# Altium PCB V72_A33.PcbDoc
Units mil, origin at the board's own origin, x right, y up, seen from the top; angles counter-clockwise.
Board outline 1295 x 2050 mil, 2 copper layers (Top Layer, Bottom Layer); 4 components, 19 nets, 95 pads, 3 vias.
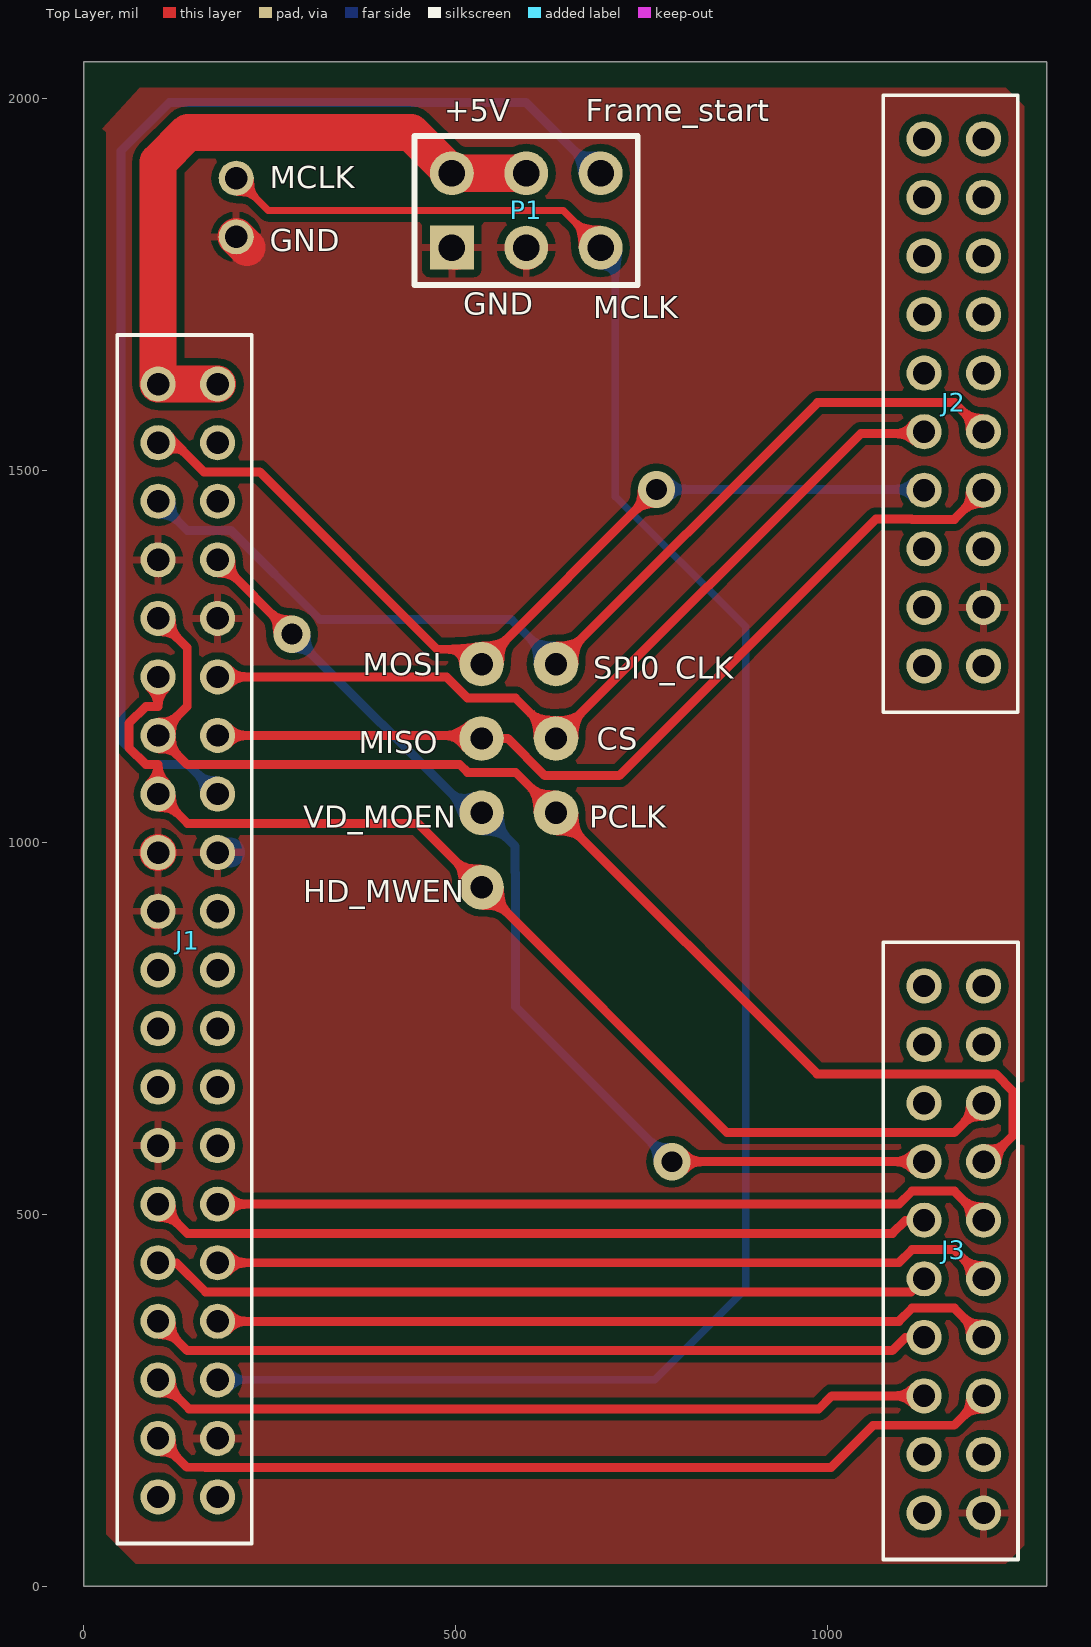
[diagram p0: Top Layer view]
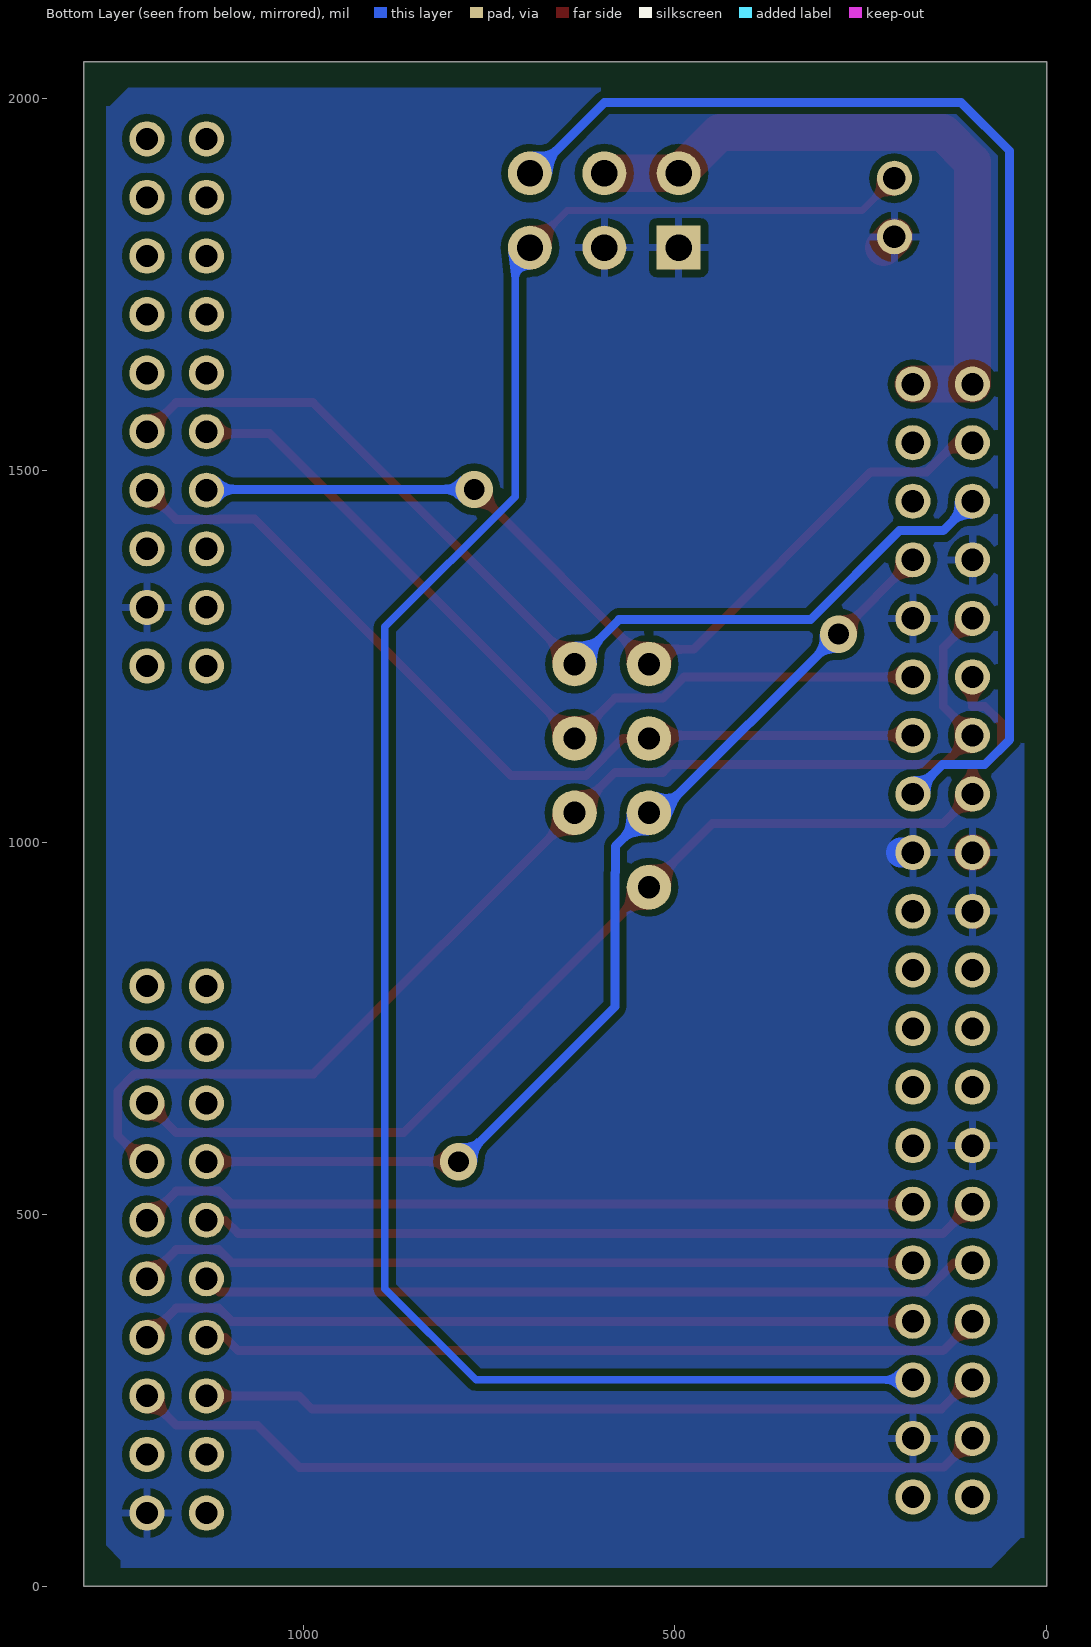
[diagram p1: Bottom Layer view, seen from below]

## Layer stack, top to bottom
Top Solder: solder mask 0.4, Solder Resist, Dk 3.5
Top Layer: signal copper 1.4
Dielectric 1: dielectric 12.6, FR-4, Dk 4.8
Bottom Layer: signal copper 1.4
Bottom Solder: solder mask 0.4, Solder Resist, Dk 3.5

## Board outline
0,0 0,2050 1295,2050 1295,0

## Design rules (kind name [scope] priority, off if disabled: settings)
Clearance [All] p1: gap=9.6 ignorepadtopadclearanceinfootprint=FALSE
PolygonConnect [All] p1: connectstyle=Relief reliefconductorwidth=10 reliefentries=4 polygonreliefangle="90 Angle" airgapwidth=10
RoutingVias [All] p1: holewidth=28 width=50 viastyle="Through Hole" minholewidth=28 minwidth=50 maxholewidth=28 maxwidth=50
SilkToSilkClearance [All] p1: silktosilkclearance=0
SilkToSolderMaskClearance [IsPad] p1: minsilkscreentomaskgap=0 clearancetoexposedcopper=TRUE
SolderMaskExpansion [All] p1: expansion=4
Width Width__VCC [InNet('+5V')] p1: maxlimit=50 minlimit=10 preferedwidth=30
Width [All] p2: maxlimit=50 minlimit=10 preferedwidth=10
28 further rules are at their usual default settings.

## Classes and differential pairs
component class V72_A33: P1

## Components (designator, comment, footprint, x,y, rotation, side; value= is the part's Value field where it differs from the comment)
J1 "header2*20_2mm" header2*20_2mm 45,57.64 r0 top
J2 "header2*10_2mm" header2*10_2mm 1075,1175.12 r0 top
J3 "header2*10_2mm" header2*10_2mm 1075.04,36.06 r0 top
P1 "Header 3X2" HDR2X3 495,1800 r0 top

## Footprints (in the part's own frame and the unit in brackets; to place one, negate y for a bottom-side part, rotate by r counter-clockwise, add the part's x,y. Pads: shape width x height; smd on the part's side, far side on the other; paste and mask are expansions set on the pad)
HDR2X3 [mm] "Connector; Header; 3x2 Position"
  rect 1.5x1.5 hole 0.9: 1(0,0)
  round 1.5 hole 0.9: 2(0,2.54) 3(2.54,0) 4(2.54,2.54) 5(5.08,0) 6(5.08,2.54)
  silkscreen extent -1.27,-1.27 6.35,3.81
header2*10_2mm [mm] "header"
  round 1.2 hole 0.762: 1(1.396,19.586) 2(3.429,19.586) 3(1.396,17.586) 4(3.429,17.586) 5(1.396,15.586) 6(3.429,15.586) 7(1.396,13.586) 8(3.429,13.586) 9(1.396,11.586) 10(3.429,11.586) 11(1.396,9.586) 12(3.429,9.586) 13(1.396,7.586) 14(3.429,7.586) 15(1.396,5.586) 16(3.429,5.586) 17(1.396,3.586) 18(3.429,3.586) 19(1.396,1.586) 20(3.429,1.586)
  silkscreen extent 0,0 4.6,21.08
header2*20_2mm [mm]
  round 1.2 hole 0.762: 1(1.397,39.594) 2(3.43,39.594) 3(1.397,37.594) 4(3.43,37.594) 5(1.397,35.594) 6(3.43,35.594) 7(1.397,33.594) 8(3.43,33.594) 9(1.397,31.594) 10(3.43,31.594) 11(1.397,29.594) 12(3.43,29.594) 13(1.397,27.594) 14(3.43,27.594) 15(1.397,25.594) 16(3.43,25.594) 17(1.397,23.594) 18(3.43,23.594) 19(1.397,21.59) 20(3.43,21.59) 21(1.396,19.586) 22(3.429,19.586) 23(1.396,17.586) 24(3.429,17.586) 25(1.396,15.586) 26(3.429,15.586) 27(1.396,13.586) 28(3.429,13.586) 29(1.396,11.586) 30(3.429,11.586) 31(1.396,9.586) 32(3.429,9.586) 33(1.396,7.586) 34(3.429,7.586) 35(1.396,5.586) 36(3.429,5.586) 37(1.396,3.586) 38(3.429,3.586) 39(1.396,1.586) 40(3.429,1.586)
  silkscreen extent 0,0 4.6,41.27

## Part data
P1: "Header, 3-Pin, Dual row", LatestRevisionDate=17-Jul-2002, LatestRevisionNote="Re-released for DXP Platform.", Publisher="Altium Limited"

## Free pads (board coordinates)
  round 60 hole 30: 42(535,1040) 43(535,1140) 44(535,1240) 45(635,1040) 46(635,1140) 47(635,1240) 50(535,940)
  round 47.24 hole 30: 48(205,1893.35) 49(205,1814.61)

## Via types
v1: diameter 50, hole 28, Top Layer to Bottom Layer, 3 vias

## Nets (pads, with @x,y where several pads share a name; then routed paths per layer and width w, separated by ;. In a path a pad name is that pad's centre, name@x,y a point inside that pad or via, vN(x,y) a via of type N, cw(c..) or ccw(c..) an arc to the next point about the centre after c; other vN are vias at no path point)
+5V: J1.1 J1.2 P1.2 P1.4 | length 912.9
  Top Layer w50: J1.2 J1.1 100,1915 140,1955 440,1955 P1.2 P1.4
A0: J1.37 J3.16 | length 1166.3
  Top Layer w12: J1.37 138.78,160 163.35,160 163.75,159.6 1004.6,159.6 1061.47,216.47 1170.52,216.47 J3.16
A1: J1.35 J3.15 | length 1053.6
  Top Layer w12: J1.35 102.44,277.56 141.66,238.34 988.34,238.34 1005.98,255.98 J3.15
A2: J1.34 J3.14 | length 1053.6
  Top Layer w12: J1.34 1096.11,356.3 1113.75,373.95 1170.82,373.95 J3.14
A3: J1.33 J3.13 | length 1053.8
  Top Layer w12: J1.33 139.48,316.78 1087.14,316.78 1105.08,334.72 J3.13
A4: J1.32 J3.12 | length 1053.6
  Top Layer w12: J1.32 1096.11,435.04 1113.75,452.69 1170.82,452.69 J3.12
A5: J1.31 J3.11 | length 1053.6
  Top Layer w12: J1.31 124.53,435.04 163.75,395.82 1112.35,395.82 J3.11
A6: J1.30 J3.10 | length 1053.6
  Top Layer w12: J1.30 1096.11,513.78 1113.75,531.43 1170.82,531.43 J3.10
A7: J1.29 J3.9 | length 1053.6
  Top Layer w12: J1.29 139.18,474.56 1087.43,474.56 1105.08,492.2 J3.9
Frame_start: J1.16 P1.6 | length 1663.1
  Bottom Layer w12: J1.16 140.52,1104.79 83.75,1104.79 50,1138.55 50,1930 115,1995 595,1995 690,1900 P1.6
GND: J1.7 J1.10 J1.17 J1.18 J1.19 J1.27 J1.38 J2.18 J3.20 P1.1 P1.3 pad.49 | length 91.6
  Top Layer w12: J1.19@94.17,890 100,890 J1.19 ; J1.7 J1.7@115.24,1380.24 ; J2.18 J2.18@1213.7,1316.3
  Top Layer w50: pad.49 pad.49@219.61,1800 ; P1.1 P1.1@500,1795 ; P1.3@595,1795 P1.3
  Bottom Layer w40: J1.18 J1.18@196.54,986.54
HD_MWEN: J1.11 J1.15 J3.6 pad.50 | length 1524.1
  Top Layer w12: J1.11 100,1183.24 83.75,1183.24 60.78,1160.26 60.78,1127.77 83.75,1104.79 100,1104.79 J1.15 139.52,1025.76 449.24,1025.76 pad.50 864.83,610.17 1146.25,610.17 1146.41,610 1170.35,610 J3.6
MCLK: J1.36 P1.5 pad.48 | length 2770.2
  Top Layer w10: pad.48 248.35,1850 645,1850 P1.5
  Bottom Layer w10: J1.36 767.56,277.56 890,400 890,1290 715,1465 715,1780 P1.5
PCLK: J1.9 J1.13 J3.8 pad.45 | length 1651.3
  Top Layer w12: J1.9 139.22,1262.27 139.22,1183.24 J1.13 139.22,1104.79 196.29,1104.79 196.49,1105 505.51,1105 516.11,1094.4 580.6,1094.4 pad.45 986.09,688.91 1226.29,688.91 1249.26,665.93 1249.26,605.74 1214.47,570.94 J3.8
SPI0-CLK: J1.5 J2.12 pad.47 | length 1362.6
  Top Layer w12: pad.47 986.74,1591.74 1170.78,1591.74 J2.12
  Bottom Layer w12: J1.5 139.52,1419.46 198.23,1419.46 317.69,1300 575,1300 pad.47
SPI0-CS: J1.12 J2.11 pad.46 | length 1155.1
  Top Layer w12: J1.12 487.76,1222.76 516.11,1194.4 580.6,1194.4 pad.46 1045,1550 1127.44,1550 J2.11
SPI0-MISO: J1.14 J2.14 pad.43 | length 1211.7
  Top Layer w12: J1.14 530.98,1144.02 pad.43 570,1140 620,1090 720,1090 1065,1435 1113.27,1435 1113.71,1434.56 1170.78,1434.56 J2.14
SPI0-MOSI: J1.3 J2.13 pad.44 | length 1251.1
  Top Layer w12: J1.3 122.28,1537.72 161.51,1498.49 236.51,1498.49 475,1260 515,1260 pad.44 v1(770,1475)
  Bottom Layer w12: v1(770,1475) 1128.74,1475 J2.13
VD_MOEN: J1.8 J3.7 pad.42 | length 1403.5
  Top Layer w12: J1.8 v1(280,1280.28) ; v1(790.94,570.94) J3.7
  Bottom Layer w12: v1(280,1280.28) 520.28,1040 pad.42 580,995 580,960.09 580.6,959.49 580.6,779.4 v1@785,575
pads on no net: J1.4 J1.6 J1.20 J1.21 J1.22 J1.23 J1.24 J1.25 J1.26 J1.28 J1.39 J1.40 J2.1 J2.2 J2.3 J2.4 J2.5 J2.6 J2.7 J2.8 J2.9 J2.10 J2.15 J2.16 J2.17 J2.19 J2.20 J3.1 J3.2 J3.3 J3.4 J3.5 J3.17 J3.18 J3.19

## Polygon pours and split planes (outlines as drawn)
GND on Top Layer "Mechanical 1-No Net" (solid, remove dead copper, pour order 0): 75,2015 1240,2015 1265,1990 1265,55 1240,30 70,30 30,70 30,1955 25,1960
GND on Bottom Layer "Mechanical 1-No Net" (solid, remove dead copper, pour order 2): 80,2015 1235,2015 1260,1990 1265,1990 1265,55 1245,35 1245,25 75,25 35,65 30,65 30,1965

## Silkscreen, mask and mechanical layers (free items; w line width, h text height)
Top Overlay:
  text "+5V" at 485,1970 h30
  text "Frame_start" at 675,1970 h30
  text "MCLK" at 250,1880 h30
  text "GND" at 250,1795 h30
  text "GND" at 510,1710 h30
  text "MCLK" at 685,1705 h30
  text "MOSI" at 375,1225 h30
  text "SPI0_CLK" at 685,1220 h30
  text "CS" at 690,1125 h30
  text "MISO" at 370,1120 h30
  text "VD_MOEN" at 295,1020 h30
  text "PCLK" at 680,1020 h30
  text "HD_MWEN" at 295,920 h30
Mechanical 1:
  lines w10: 5,0 0,0 ; 0,0 1295,0 1295,2050 0,2050 0,0